# EAGLE board Door_switch_v2 (EAGLE 7.2.0)
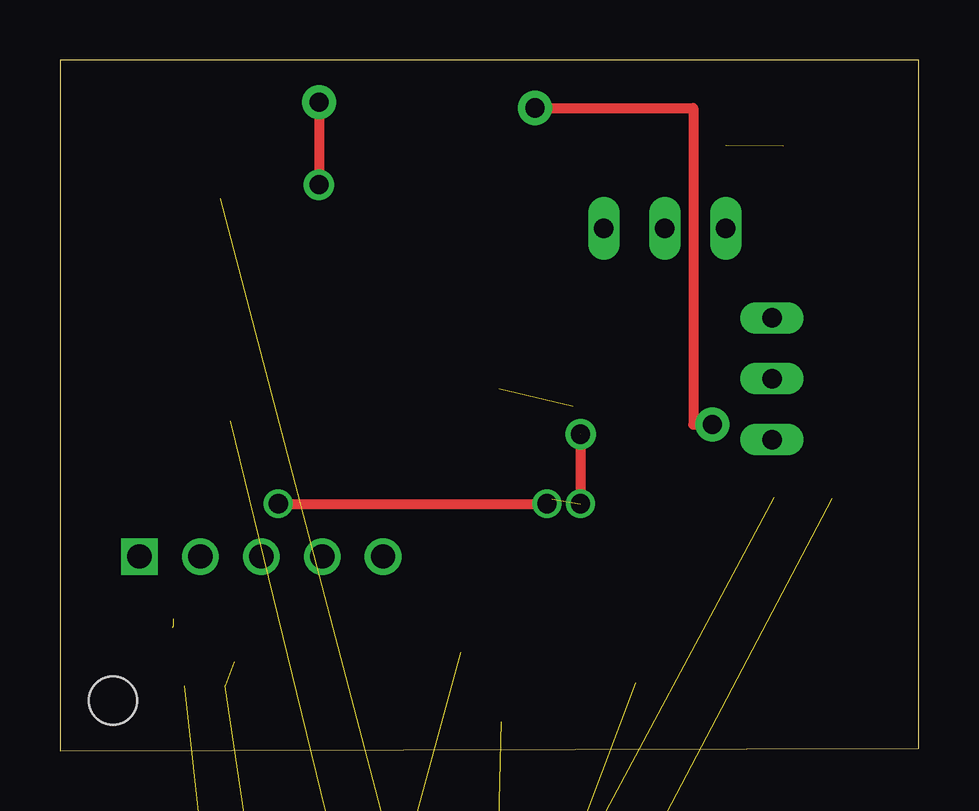
[diagram p0: board, top side]
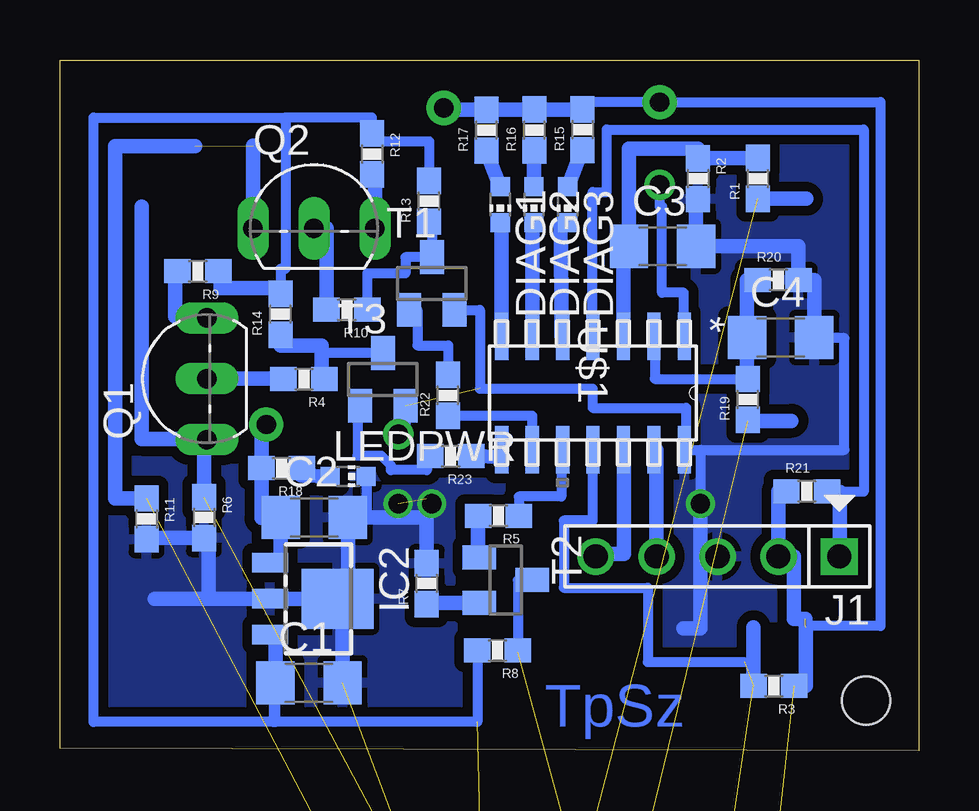
[diagram p1: board, bottom side, seen from below]

Size 35.8 x 28.8 mm. Coordinates in mm from the lower left corner, seen from the top.
Outline: 0,0 35.8,0.1 35.8,28.8 0,28.8 0,0
Copper layers (1*16): Top 0.035mm / dielectric 1.5mm / Bottom 0.035mm
Design rules "default": minimum track width 10mil, minimum drill 24mil, track to track 8mil, track to pad 8mil, pad to pad 8mil, via to via 8mil, smd to smd 8mil, copper to edge 40mil, drill to drill 8mil, minimum pad ring 10mil, minimum via ring 8mil, stop-mask expansion 4mil, vias tented up to drill 0mil, thermal gap 10mil
Holes 2 mm at 2.2,2.1

## Footprints (pad centres in the part's own frame; a part is rotated, then mirrored left to right if it is on the bottom)
C1206 = smd 1.6 x 1.8: 1 -1.4,0; 2 1.4,0
CHIP-LED0603 = smd 0.8 x 0.8: A 0,-0.75; C 0,0.75
SOT89 = smd 0.8 x 1.5: 1 -1.5,-1.75; 2 0,-1.75; 3 1.5,-1.75 | smd 2.5 x 3: 4 0,1.05
HEADER_PRG_1X05 = drill 1.016 square: 1 -5.08,0 | drill 1.016: 2 -2.54,0; 3 0,0; 4 2.54,0; 5 5.08,0
TO92-EBC = drill 0.813 long: B 0,-1.27; C -2.54,-1.27; E 2.54,-1.27
0603-RES = smd 1.1 x 1: 1 -0.85,0; 2 0.85,0
SOT23 = smd 1 x 1.4: 1 -0.95,-1.1; 2 0.95,-1.1; 3 0,1.1
SOIC14-N_MC = smd 1.981 x 0.559: 1 -2.362,3.81; 2 -2.362,2.54; 3 -2.362,1.27; 4 -2.362,0; 5 -2.362,-1.27; 6 -2.362,-2.54; 7 -2.362,-3.81; 8 2.362,-3.81; 9 2.362,-2.54; 10 2.362,-1.27; 11 2.362,0; 12 2.362,1.27; 13 2.362,2.54; 14 2.362,3.81
F09HP = drill 1.016 octagon: 1 -5.486,-1.27; 2 -2.743,-1.27; 3 0,-1.27; 4 2.743,-1.27; 5 5.486,-1.27; 6 -4.115,1.27; 7 -1.372,1.27; 8 1.372,1.27; 9 4.115,1.27 | drill 3.302 pad 5.08: G1 -12.522,0; G2 12.522,0

## Placement (x,y rotation side)
C1  [C1206]  25.42,2.83 0 bottom
C2  [C1206]  25.2,9.73 0 bottom
C3  [C1206]  10.68,21.03 0 bottom
C4  [C1206]  5.76,17.23 0 bottom
DIAG1  [CHIP-LED0603]  17.45,22.77 180 bottom
DIAG2  [CHIP-LED0603]  16.04,22.77 180 bottom
DIAG3  [CHIP-LED0603]  14.63,22.77 180 bottom
IC2  L78LXXCU/BU  [SOT89]  25.28,6.34 270 bottom
J1  CON_HEADER_PRG_PIC_ICSPA  [HEADER_PRG_1X05]  8.39,8.1 180 bottom
LEDPWR  [CHIP-LED0603]  23.79,11.44 270 bottom
Q1  BC327  [TO92-EBC]  30.95,15.51 90 bottom
Q2  BC327  [TO92-EBC]  25.21,23.05 0 bottom
R1  33k  [0603-RES]  6.7,23.86 90 bottom
R2  10k  [0603-RES]  9.2,23.85 270 bottom
R3  10k  [0603-RES]  6.04,2.7 180 bottom
R4  10k  [0603-RES]  25.63,15.5 180 bottom
R5  10k  [0603-RES]  17.52,9.8 180 bottom
R6  10k  [0603-RES]  29.79,9.72 270 bottom
R7  100  [0603-RES]  20.51,6.97 90 bottom
R8  10k  [0603-RES]  17.56,4.19 180 bottom
R9  100  [0603-RES]  30.05,19.99 180 bottom
R10  10k  [0603-RES]  23.84,18.39 180 bottom
R11  10k  [0603-RES]  32.19,9.67 270 bottom
R12  100  [0603-RES]  22.79,24.88 270 bottom
R13  10k  [0603-RES]  20.41,22.91 90 bottom
R14  10k  [0603-RES]  26.61,18.2 90 bottom
R15  10k  [0603-RES]  14.01,25.89 90 bottom
R16  10k  [0603-RES]  16.02,25.88 90 bottom
R17  10k  [0603-RES]  18.02,25.87 90 bottom
R18  10k  [0603-RES]  26.56,11.78 180 bottom
R19  33k  [0603-RES]  7.12,14.65 90 bottom
R20  10k  [0603-RES]  5.86,19.62 0 bottom
R21  10k  [0603-RES]  4.67,10.82 0 bottom
R22  10k  [0603-RES]  19.62,14.82 90 bottom
R23  10k  [0603-RES]  19.51,12.28 180 bottom
T1  BC846  [SOT23]  20.3,19.48 0 bottom
T2  BC846  [SOT23]  17.22,7.12 270 bottom
T3  BC846  [SOT23]  22.34,15.48 0 bottom
U$1  PIC16F505-X/SL  [SOIC14-N_MC]  13.58,14.91 270 bottom
X1  [F09HP]  13.7,-23.3 0 top  (outside the outline)

## Library data of the parts
C1-C4 = eagle-ltspice; SPICEMODEL: NONE; SPICEPREFIX: C
DIAG1-DIAG3 LEDPWR = adafruit
IC2 = v-reg-2
J1 = dp_devices
Q1 Q2 = transistor-pnp
R1-R23 = SparkFun
T1-T3 = transistor
U$1 = PIC16F505_SOIC
X1 = con-subd; OC_FARNELL: unknown; OC_NEWARK: unknown

## Nets
+5V: C2.1 IC2.1 J1.2 R3.1 R15.2 R16.2 R17.2 R18.2 R21.1 U$1.1 X1.1
+15V: C1.1 IC2.3 R8.2 R9.1 R12.1 R13.2 R14.2 X1.9
AUX: C4.1 R19.2 R20.1 U$1.2
AUX_IN: R19.1 X1.4
DIAG1: DIAG1.C U$1.7
DIAG2: DIAG2.C U$1.6
DIAG3: DIAG3.C U$1.5
DO: R5.1 U$1.10
DOOR_OUT: R8.1 T2.3 X1.6
DOOR_SW: R3.2 U$1.11 X1.2
FRAME: C1.2 C2.2 C3.2 C4.2 IC2.2 IC2.4 J1.3 LEDPWR.C R2.2 R6.2 R7.2 R11.2 R20.2 U$1.14 X1.3
GND: T1.2 T3.2
LOCK_IN: R1.1 X1.5
LOCK_SW: C3.1 R1.2 R2.1 U$1.3
MCLR: J1.1 R21.2 U$1.4
N$2: Q2.B R10.2
N$3: Q2.C R11.1 X1.8
N$4: R7.1 T2.2
N$5: R5.2 T2.1
N$6: Q2.E R12.2
N$7: DIAG3.A R15.1
N$8: DIAG2.A R16.1
N$9: Q1.B R4.2
N$10: Q1.C R6.1 X1.7
N$11: Q1.E R9.2
N$12: DIAG1.A R17.1
N$13: LEDPWR.A R18.1
N$15: R22.2 T1.1
N$16: R23.2 T3.1
PGC: J1.5 U$1.12
PGD: J1.4 U$1.13
W1: R22.1 U$1.9
W2: R23.1 U$1.8
WIN1: R10.1 R13.1 T1.3
WIN2: R4.1 R14.1 T3.3

## Tracks (layer width: path | path; a pad name or v marks a point on that pad's centre or on a via)
+5V  (via drill 0.8 pad 1.27, 0.8 pad 1.42)  (3 unrouted)
  Top 0.406: v10.8,27.04 v10.8,23.6 | v19.8,26.8 26.4,26.8 26.4,13.6 v27.2,13.6
  Bottom 0.406: 4.73,5.2 1.6,5.2 1.6,27.04 v10.8,27.04 14.01,27.04 R15.2 | U$1.1 9.8,17.27 9.8,19.1 10.7,19.1 10.7,22.7 10.8,22.7 v10.8,23.6
  Bottom 0.61: IC2.1 26.6,7.84 C2.1 26.6,9.7 27.4,9.7 27.4,11.88 | R16.2 R17.2 19.6,26.72 v19.8,26.8 | R16.2 | R16.2 14.01,26.72 R15.2 | R21.1 5.85,10.82 J1.2 5.2,8.1 5.2,5.5 4.73,5.5 | 4.7,5.15 4.7,2.7 R3.1 | R18.2 27.4,11.88 | 27.4,11.88 27.4,13.4 v27.2,13.6
+15V  (1 unrouted)
  Bottom 0.406: R14.2 26.61,20.1 26.4,20.1 26.4,26.2 26.4,26.4 | R8.2 18.4,1.2 26.82,1.2 C1.1 | IC2.3 26.9,4.84 26.9,1.2 34.4,1.2 34.4,26.4 26.4,26.4 | R13.2 20.4,25.4 22.79,25.4 R12.1 22.8,26.4 26.4,26.4
  Bottom 0.61: IC2.3 26.82,4.84 C1.1 26.82,3.06 | R9.1 29.1,19.99 29.1,19.3 26.61,19.3 R14.2 | R8.2
AUX
  Bottom 0.406: R19.2 7.16,15.6 7.16,15.5 11,15.5 11,17.27 U$1.2
  Bottom 0.61: R20.1 7.16,19.62 C4.1 7.16,15.6
AUX_IN  (1 unrouted)
  Bottom 0.406: 7.12,13.75 R19.1
  Bottom 0.61: 7.12,13.75 5.31,13.75
DIAG1
  Bottom 0.61: DIAG1.C 17.4,22.02 17.4,18.8 17.39,18.8 U$1.7
DIAG2
  Bottom 0.61: U$1.6 16.1,17.27 16.1,22 16.04,22 DIAG2.C
DIAG3
  Bottom 0.61: U$1.5 14.9,17.27 14.9,19 14.93,22 DIAG3.C
DO
  Bottom 0.406: U$1.10 14.9,12.55 14.9,10.6 16.67,10.6 R5.1
DOOR_OUT  (1 unrouted)
  Bottom 0.406: T2.3 16.71,7.12 R8.1
  Bottom 0.61: 16.71,4.1 R8.1
DOOR_SW  (2 unrouted)
  Bottom 0.406: U$1.11 13.6,12.55 13.6,9.6 14.8,9.6 14.8,6.8 11.3,6.8 11.3,3.7 7.27,3.7
  Bottom 0.61: 6.89,5.15 R3.2
FRAME  (via drill 0.8)  (2 unrouted)
  Top 0.406: v9.1,10.3 v20.3,10.3
  Bottom 0.406: U$1.14 9.1,12.55 | 9.1,12.55 v9.1,10.3 | R7.2 20.6,7.82 | 9.1,12.55 3.1,12.55 3.1,17.2 4.36,17.2 C4.2 | 23,9.73 23,11.5 23.04,11.5 LEDPWR.C | 23.92,4 24.02,3.9
  Bottom 0.61: IC2.4 IC2.2 29.6,6.34 | 29.6,6.34 31.85,6.34 | IC2.4 24.02,6.34 24.02,3.9 C1.2 | IC2.4 23.8,6.34 C2.2 23,9.73 20.51,9.73 | 29.6,6.34 29.6,8.87 R6.2 32.19,8.87 R11.2 | 20.51,9.73 R7.2 | J1.3 9.1,8.1 | 9.1,8.1 9.1,5.1 9.81,5.1 | v9.1,10.3 9.1,8.1 | R2.2 9.28,23 C3.2 5.01,21.03 R20.2 4.36,19.62 C4.2 | v20.3,10.3 20.51,10.5 20.51,9.73
  other vias: 21.7,10.3
  pour Bottom (isolate 0.406): 0,28.8 35.8,28.8 35.9,0 0,0.1
GND  (2 unrouted)
  Top 0.406: 21.7,13.2 21.7,10.2
  Bottom 0.406: 9.7,12.5 9.7,14.3 13.6,14.3 13.6,15.1 18.3,15.1 18.3,18.38 T1.2 | T3.2 21.39,13.51 21.7,13.2
LOCK_IN  (1 unrouted)
  Bottom 0.61: R1.1 4.69,23.01
LOCK_SW
  Bottom 0.61: U$1.3 12.31,21.03 C3.1 12.08,25.1 9.2,25.1 R2.1 R1.2
MCLR
  Bottom 0.406: U$1.4 13.6,17.27 13.6,23.3 13,23.3 13,25.9 2.3,25.9 2.3,10.8 3.3,10.8
  Bottom 0.61: J1.1 3.3,10.8 3.82,10.8 R21.2
N$2
  Bottom 0.61: Q2.B 24.69,21.78 R10.2
N$3  (2 unrouted)
  Bottom 0.61: 27.75,25.22 Q2.C | R11.1 33.5,10.52 33.5,25.2 30.16,25.2
N$4
  Bottom 0.61: T2.2 20.51,6.17 R7.1
N$5
  Bottom 0.61: T2.1 18.37,8.07 R5.2
N$6
  Bottom 0.61: R12.2 22.67,24.03 Q2.E
N$7
  Bottom 0.61: R15.1 14.03,25.04 DIAG3.A
N$8
  Bottom 0.61: R16.1 16.04,25.03 DIAG2.A
N$9
  Bottom 0.61: Q1.B R4.2
N$10  (1 unrouted)
  Bottom 0.61: R6.1 29.79,12.97 Q1.C 29.68,13 32.4,13 32.4,22.68
N$11
  Bottom 0.61: R9.2 31,19.99 31,18.1 29.68,18.1 Q1.E
N$12
  Bottom 0.61: R17.1 18.05,25.02 DIAG1.A
N$13
  Bottom 0.61: R18.1 25.74,11.48 LEDPWR.A
N$15
  Bottom 0.406: T1.1 20.9,18.38 20.9,16.9 19.62,16.9 R22.2
N$16
  Bottom 0.406: T3.1 23.4,14.38 23.4,12.3 22.4,12.3 22,11.9 22,11.7 20.5,11.7 20.5,12.3 20.36,12.3 R23.2
N$17  (via drill 0.8 pad 1.27)
  other vias: 21.7,13.2
PGC
  Bottom 0.61: U$1.12 12.3,8.2 13.47,8.2 J1.5
PGD
  Bottom 0.61: U$1.13 10.93,12.55 J1.4
W1
  Bottom 0.406: R22.1 16.12,13.97 U$1.9
W2
  Bottom 0.61: U$1.8 17.36,12.25 R23.1
WIN1
  Bottom 0.406: R13.1 20.3,22.06 T1.3 21.4,20.58 21.4,19.9 22.99,19.9 R10.1
WIN2
  Bottom 0.406: T3.3 24.9,16.58 24.9,16.9
  Bottom 0.61: R14.1 26.61,16.9 24.9,16.9 24.9,15.5 R4.1 24.78,15.56

## Text on the board
Bottom: TpSz